# Altium PCB Tigershark 3D R1.4.PcbDoc (part 4 of 4)
Units mil, origin at the board's own origin, x right, y up, seen from the top; angles counter-clockwise.
Board outline 5500 x 4400 mil, 4 copper layers (Top Layer, Groun Plane, Power Plane, Bottom Layer); 267 components, 257 nets, 998 pads, 809 vias.
Unrouted connection lines stored in the file: 3.
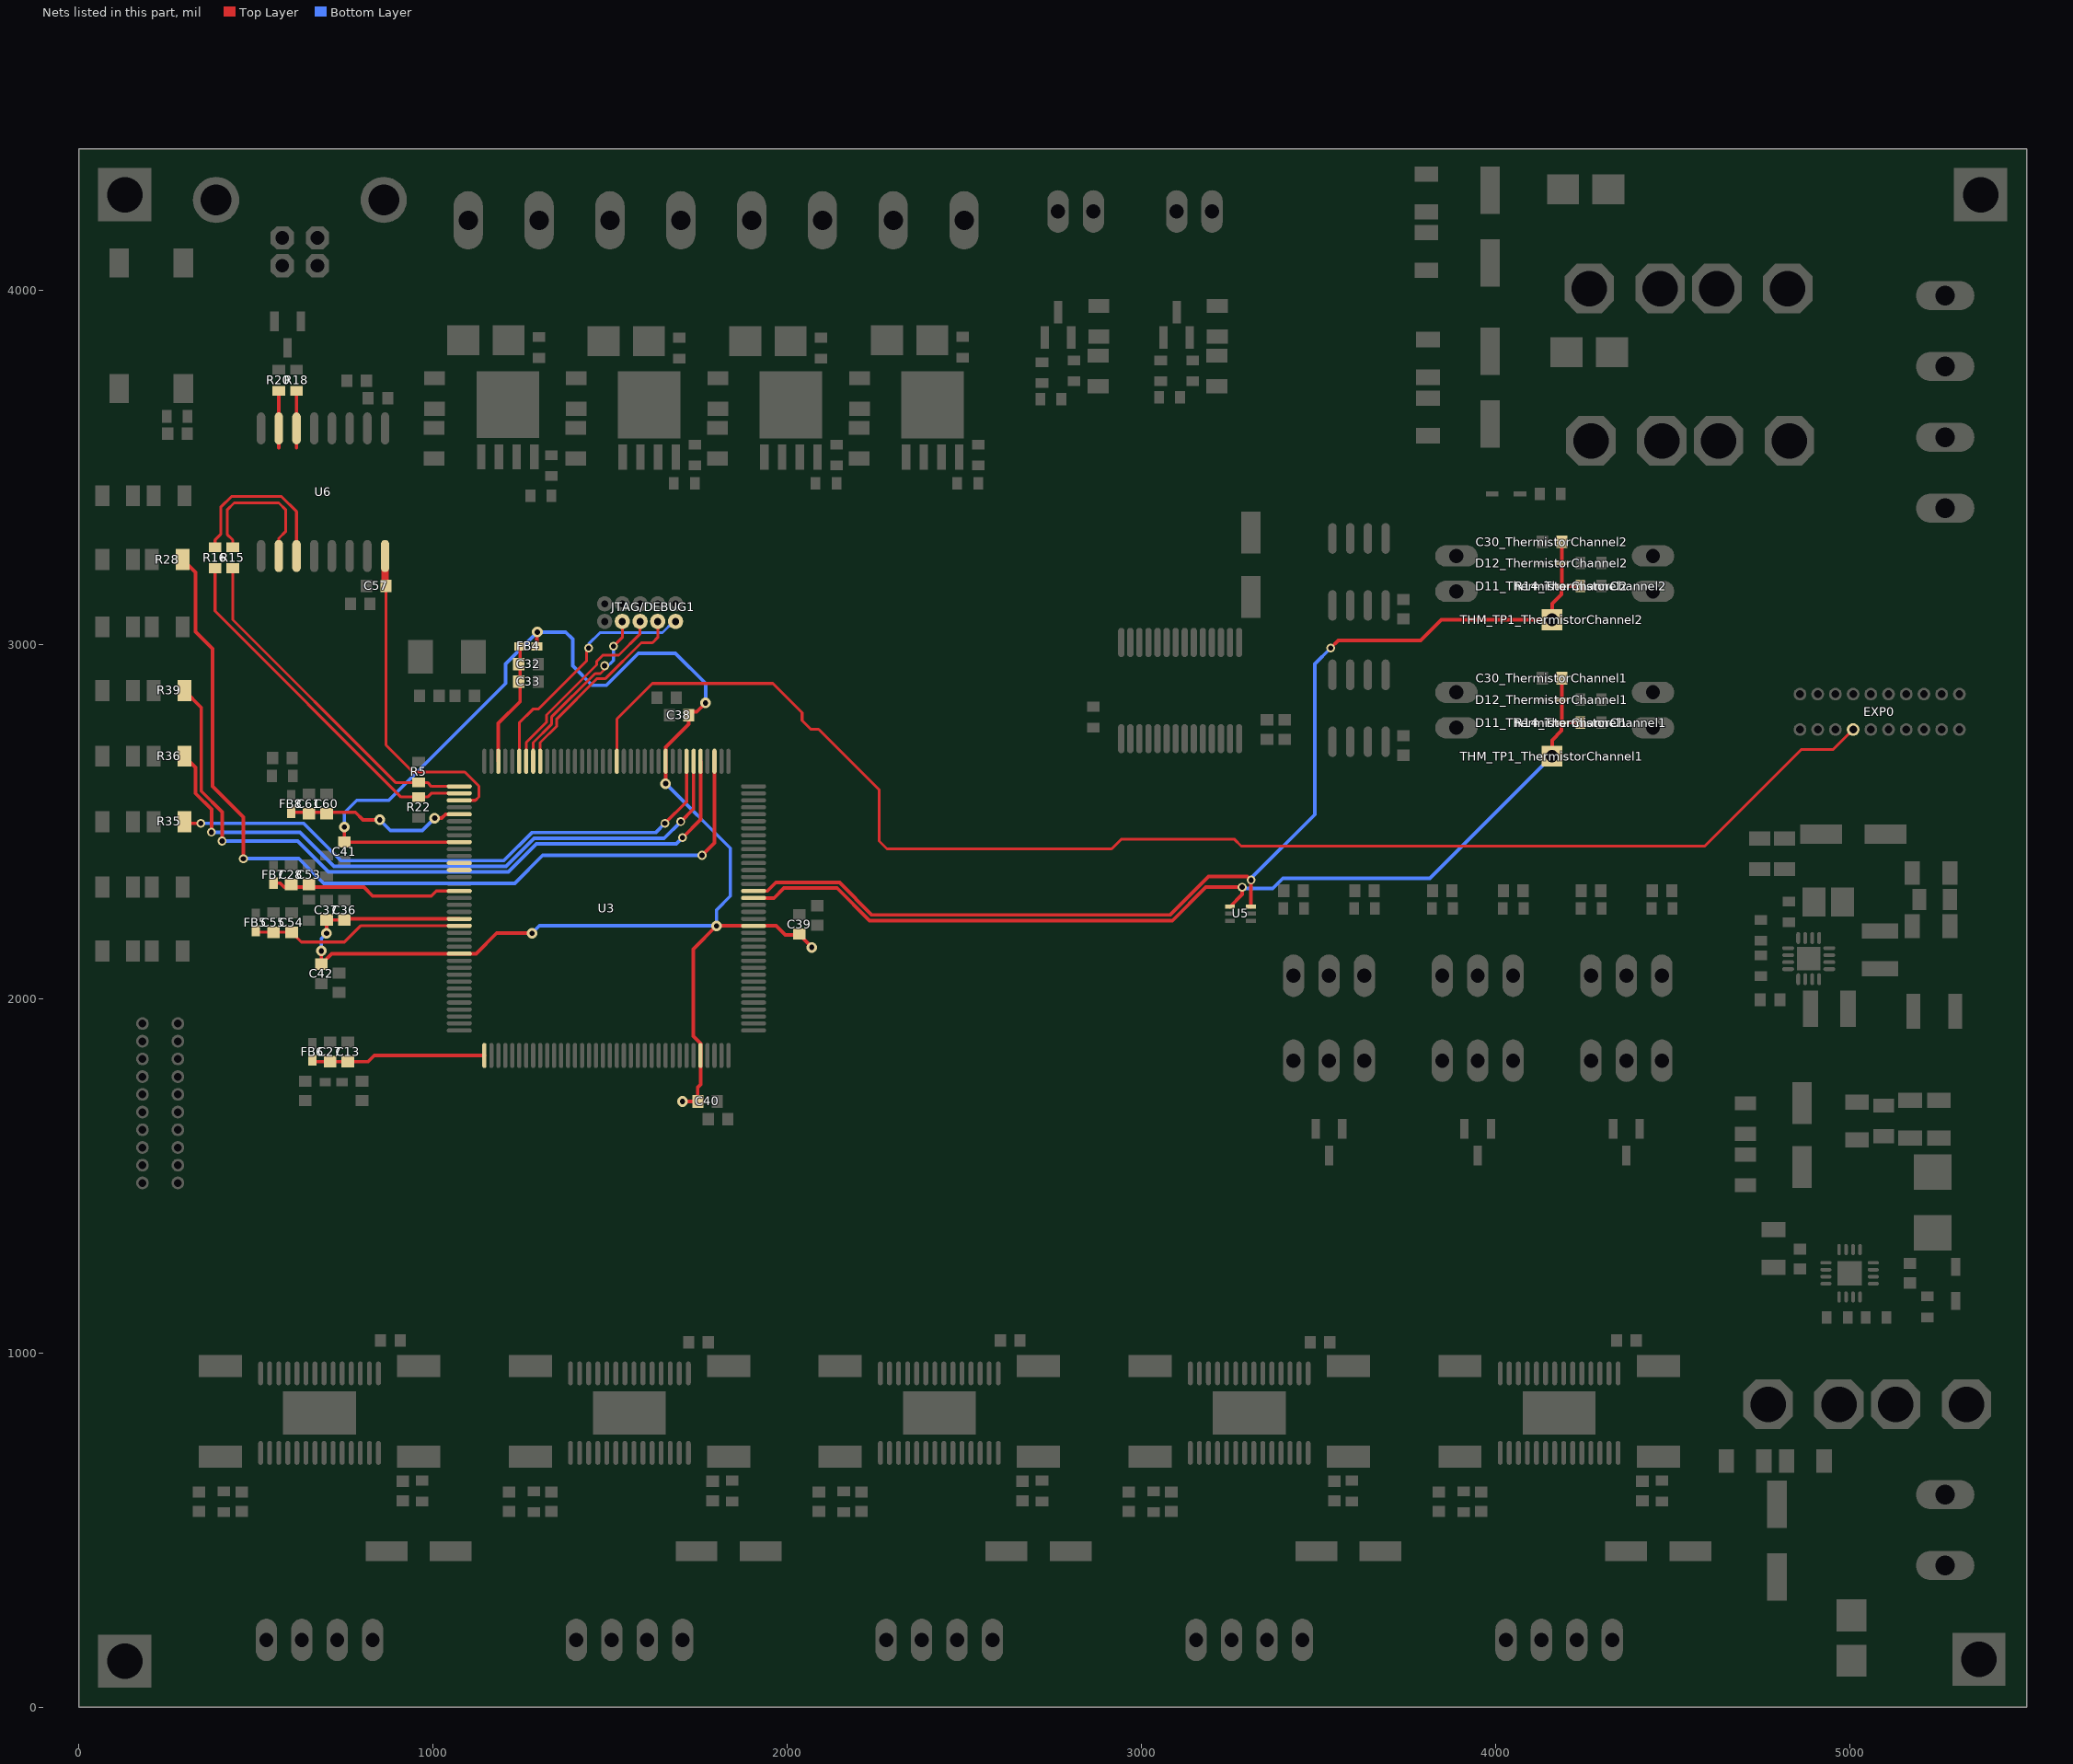
[diagram p6: the nets of this part, all layers, seen from the top]

## Via types
v1: diameter 25, hole 15, Top Layer to Bottom Layer, tented both sides, 375 vias
v2: diameter 30, hole 15, Top Layer to Bottom Layer, tented both sides, 335 vias
v3: diameter 19.68, hole 7.87, Top Layer to Bottom Layer, tented both sides, 75 vias
v4: diameter 50, hole 28, Top Layer to Bottom Layer, tented both sides, 12 vias
v5: diameter 50, hole 20, Top Layer to Bottom Layer, tented both sides, 9 vias
v6: diameter 30, hole 20, Top Layer to Bottom Layer, tented both sides, 3 vias

## Nets (pads, with @x,y where several pads share a name; then routed paths per layer and width w, separated by ;. In a path a pad name is that pad's centre, name@x,y a point inside that pad or via, vN(x,y) a via of type N, cw(c..) or ccw(c..) an arc to the next point about the centre after c; other vN are vias at no path point) (continued)
TCK/SWDCLK: JTAG/DEBUG1.4 U3.28 | length 564.4
  Top Layer w8: U3.28@1302.99,2670.35 1302.99,2722.99 1350,2770 1350,2790 1464,2904 1487.48,2904 1588.48,3005 1620,3005 1635,3020 JTAG/DEBUG1.4@1635,3065
TDI: JTAG/DEBUG1.8 U3.29 | length 521.7
  Top Layer w8: U3.29@1283.31,2670.35 1283.31,2723.11 1335,2774.8 1335,2794.8 1458.2,2918 1473,2918 1490,2935 v1(1485,2940) ; v1(1510,2995) 1535,3020 JTAG/DEBUG1.8@1535,3065
  Bottom Layer w8: v1(1485,2940) 1490,2935 1510,2955 v1(1510,2995)
TDO/SWO: JTAG/DEBUG1.6 U3.30 | length 554.1
  Top Layer w8: U3.30@1263.62,2670.35 1263.62,2723.62 1321,2781 1321,2801.2 1462.5,2942.7 1462.5,2952.5 1480,2970 1525,2970 1585,3030 JTAG/DEBUG1.6@1585,3065
THERM_AN1: C30_ThermistorChannel1.2 D11_ThermistorChannel1.1 D12_ThermistorChannel1.2 R14_ThermistorChannel1.1 THM_TP1_ThermistorChannel1.1 U3.128 U5.4 | length 2853.1
  Top Layer w10: U3.128@1905.35,2284.53 1963.31,2284.53 1991.24,2312.45 2118.93,2312.45 2119.15,2312.23 2141.37,2312.23 2233.1,2220.5 3088.13,2220.5 3182.63,2315 v1(3285,2315) 3285,2294.21 U5.4@3250.47,2259.69 ; THM_TP1_ThermistorChannel1.1@4160,2685 4160,2730 4186.57,2756.57 D11_ThermistorChannel1.1@4186.57,2780 R14_ThermistorChannel1.1@4240.47,2780 ; D11_ThermistorChannel1.1@4187.56,2780.98 C30_ThermistorChannel1.2@4187.56,2905
  Bottom Layer w10: v1(3285,2315) 3288.5,2311.5 3371.5,2311.5 3400,2340 3815,2340 THM_TP1_ThermistorChannel1.1@4160,2685
THERM_AN2: C30_ThermistorChannel2.2 D11_ThermistorChannel2.1 D12_ThermistorChannel2.2 R14_ThermistorChannel2.1 THM_TP1_ThermistorChannel2.1 U3.129 U5.3 | length 3267.6
  Top Layer w10: U3.129@1905.35,2304.21 1944.21,2304.21 1968.45,2328.45 2125.56,2328.45 2125.78,2328.23 2148,2328.23 2239.73,2236.5 3081.5,2236.5 3190,2345 3300,2345 v1(3310,2335) 3310,2260.16 U5.3@3309.53,2259.69 ; v1(3535,2990) 3556.5,3011.5 3788.78,3011.5 3847.28,3070 THM_TP1_ThermistorChannel2.1@4160,3070 4160,3115 4186.57,3141.57 D11_ThermistorChannel2.1@4186.57,3165 R14_ThermistorChannel2.1@4240.47,3165 ; D11_ThermistorChannel2.1@4187.56,3165.98 C30_ThermistorChannel2.2@4187.56,3290
  Bottom Layer w10: v1(3310,2335) 3310,2340 3490,2520 3490,2945 v1(3535,2990)
TMS/SWDIO: JTAG/DEBUG1.2 U3.31 | length 692.4
  Top Layer w8: U3.31@1243.94,2670.35 1243.94,2778.94 1282.5,2817.5 1297.5,2817.5 1434.5,2954.5 1434.5,2984.5 v1(1440,2990)
  Bottom Layer w8: v1(1440,2990) 1440,3001.46 1471.89,3033.35 1648.11,3033.35 1679.76,3065 JTAG/DEBUG1.2@1685,3065
TX_LED: R28.2 U3.3 | length 2553.2
  Top Layer w10: R28.2@293.31,3240 330,3203.31 330,3035.93 378,2987.93 378,2599.37 465,2512.37 v1(465,2395) ; v1(1760,2405) 1795.12,2440.12 U3.3@1795.12,2670.35
  Bottom Layer w10: v1(465,2395) 466,2396 621.63,2396 691.63,2326 1231,2326 1310,2405 v1(1760,2405)
TXD1: EXP0.4 U3.17 | length 4097.8
  Top Layer w8: U3.17@1519.53,2670.35 1519.53,2789.73 1619.8,2890 1960,2890 2042.5,2807.5 2042.5,2785.68 2067.18,2761 2089,2761 2260,2590 2260,2445 2282,2423 2916.48,2423 2943.4,2449.93 3263.45,2449.93 3282.38,2431 4591.4,2431 4864.4,2704 4954,2704 EXP0.4@5010,2760
UD_N: R18.1 U6.6 | length 161.4
  Top Layer w10: 615,3555 R18.1@615,3716.35
UD_P: R20.1 U6.7 | length 161.4
  Top Layer w10: 565,3555 R20.1@565,3716.35
UI_N: R16.2 U6.11 | length 489.4
  Top Layer w8: R16.2@385,3274.53 385,3295 401,3311 401,3387.46 431.54,3418 572.46,3418 615,3375.46 U6.11@615,3249.88
UI_P: R15.2 U6.10 | length 433.1
  Top Layer w8: R15.2@435,3274.53 435,3295 419,3311 419,3380 439,3400 565,3400 585,3380 585,3320 565,3300 U6.10@565,3249.88
UMCU_N: R16.1 R22.1 U3.38 | length 1032.3
  Top Layer w8: R16.1@385,3215.47 385,3094.54 910.02,2569.53 R22.1@960,2569.53 985,2569.53 995.28,2579.8 U3.38@1074.65,2579.8
UMCU_P: R5.1 R15.1 U3.37 | length 980
  Top Layer w8: R15.1@435,3215.47 435,3070 894.53,2610.47 R5.1@960,2610.47 985,2610.47 995.98,2599.49 U3.37@1074.65,2599.49
VBUS: C57.2 U3.39 U6.16 | length 1011.1
  Top Layer w8: U6.16@867.56,3245 867.56,2716.33 943.89,2640 1060,2640 1090,2640 1130,2600 1130,2570 1120.12,2560.12 U3.39@1074.65,2560.12
  Top Layer w20: C57.2@865,3167.56 U6.16@865,3249.88
VDDANA: C13.2 C27.2 FB6.2 U3.73 | length 494.3
  Top Layer w10: FB6.2@663.94,1822.44 C27.2@710,1822.44 C13.2@760,1822.44 817.44,1822.44 834.65,1839.65 U3.73@1145.51,1839.65
  Top Layer w15: FB6.2@660,1826.38 FB6.2@663.94,1822.44
VDDBU: C28.2 C53.2 FB7.2 U3.52 | length 545.6
  Top Layer w10: FB7.2@550,2326.38 568.62,2326.38 580,2315 805,2315 830,2290 995.72,2290 1009.93,2304.21 U3.52@1074.65,2304.21
VDDIN: C54.2 C55.2 FB5.2 U3.57 | length 617.1
  Top Layer w8: FB5.2@501.22,2201.38 FB5.2@505.16,2197.44 ; FB5.2@503.94,2187.44 C55.2@550,2187.44 C54.2@601.22,2187.44 628.66,2160 750,2160 795.79,2205.79 U3.57@1074.65,2205.79 ; C54.2@601.22,2197.44 C54.2@608.66,2190
VDDOUT: C36.2 C37.2 C38.2 C39.2 C40.2 C41.2 C42.2 FB4.1 U3.10 U3.45 U3.56 U3.61 U3.104 U3.124 | length 5261
  Top Layer w10: v2(685,2135) C42.2@685,2097.56 714.49,2127.05 U3.61@1074.65,2127.05 1122.05,2127.05 1180,2185 v2(1280,2185) ; v2(700,2185) C37.2@700,2222.44 C36.2@750,2222.44 753.03,2225.47 U3.56@1074.65,2225.47 ; v2(750,2485) C41.2@750,2442.56 750.55,2442.01 U3.45@1074.65,2442.01 ; FB4.1@1293.62,2995 1293.62,3033.62 v2(1295,3035) ; v2(1657.32,2607.32) U3.10@1657.32,2670.35 1657.32,2709.7 1722.56,2774.93 C38.2@1722.56,2800 1732.56,2810 1745,2810 v2(1770,2835) ; v2(1705,1710) C40.2@1747.87,1710 1747.87,1749.8 1755.75,1757.68 U3.104@1755.75,1839.65 1755.75,1873.4 1735,1894.14 1735,2140 v2(1800.79,2205.79) U3.124@1905.35,2205.79 1969.21,2205.79 ; 1970.16,2204.84 1995,2180 C39.2@2035,2180 ; C39.2@2035,2182.44 C39.2@2035,2180 ; v2(2070,2145) C39.2@2035,2180
  Bottom Layer w10: v2(685,2135) 685,2170 v2(700,2185) ; v2(750,2485) 750,2525 785,2560 875,2560 1205,2890 1205,2945 v2(1295,3035) 1375,3035 1395,3015 1395,2940 1450,2885 1490,2885 1580,2975 1685,2975 1770,2890 v2(1770,2835) ; v2(1280,2185) 1300.79,2205.79 v2(1800.79,2205.79) 1800.79,2250.79 1840,2290 1840,2425 v2@1657.5,2607.5
VDDPLL: C32.2 C33.2 FB4.2 U3.34 | length 350.1
  Top Layer w10: U3.34@1184.88,2670.35 1184.88,2777.51 1246.38,2839.01 FB4.2@1246.38,2995
VDDUTMI: C60.2 C61.2 FB8.2 U3.41 | length 524.9
  Top Layer w10: FB8.2@600,2526.38 781.25,2526.38 802.63,2505 v2(850,2505) ; v2(1005,2510) 1025,2510 1035.75,2520.75 U3.41@1074.65,2520.75
  Bottom Layer w10: v2@850,2515 v2(850,2505) 880,2475 970,2475 v2(1005,2510)
X_LED: R39.2 U3.5 | length 2081.8
  Top Layer w10: R39.2@298.31,2870 346,2822.31 346,2586.12 405,2527.12 v1(405,2445) ; v1(1705,2455) 1755.75,2505.75 U3.5@1755.75,2670.35
  Bottom Layer w10: v1(405,2445) 617.88,2445 704.88,2358 1213.25,2358 1292.25,2437 1687,2437 v1(1705,2455)
XIN32: U3.48
XOUT32: U3.49
Y_LED: R36.2 U3.6 | length 1849
  Top Layer w10: R36.2@298.31,2685 330,2653.31 330,2579.49 375,2534.49 v1(375,2470) ; v1(1700,2500) 1736.06,2536.06 U3.6@1736.06,2670.35
  Bottom Layer w10: v1(375,2470) 625,2470 721,2374 1206.63,2374 1285.63,2453 1653,2453 v1(1700,2500)
Z_LED: R35.2 U3.7 | length 1646.5
  Top Layer w10: R35.2@298.31,2500 303.31,2495 v1(345,2495) ; v1(1655,2495) 1716.38,2556.38 U3.7@1716.38,2670.35
  Bottom Layer w10: v1(345,2495) 635,2495 740,2390 1200,2390 1279,2469 1629,2469 v1(1655,2495)
pads on no net: JTAG/DEBUG1.1@1760.59,3146.5 JTAG/DEBUG1.7 U1.6 U1.7 U3.55 U3.130 U3.138 U4_ThermocoupleChannel1.8 U4_ThermocoupleChannel2.8 U7_DriverChannelDRV88251.18 U7_DriverChannelDRV88251.19 U7_DriverChannelDRV88251.23 U7_DriverChannelDRV88251.27 U7_DriverChannelDRV88252.18 U7_DriverChannelDRV88252.19 U7_DriverChannelDRV88252.23 U7_DriverChannelDRV88252.27 U7_DriverChannelDRV88253.18 U7_DriverChannelDRV88253.19 U7_DriverChannelDRV88253.23 U7_DriverChannelDRV88253.27 U7_DriverChannelDRV88254.18 U7_DriverChannelDRV88254.19 U7_DriverChannelDRV88254.23 U7_DriverChannelDRV88254.27 U7_DriverChannelDRV88255.18 U7_DriverChannelDRV88255.19 U7_DriverChannelDRV88255.23 U7_DriverChannelDRV88255.27 U10.2 U10.3 USB.P$1 USB.P$2
copper on no net: | length 247.5
  Bottom Layer w8: 1740,905 1775,870 ; 2615,905 2650,870 ; 3490,905 3525,870 ; 4365,905 4400,870 4365,905

## Polygon pours and split planes (outlines as drawn)
+12VCC1 on Top Layer "Mechanical 15-No Net" (solid, pour order 73): 4955,1240 4955,1210 4895,1210 4895,1100 4665,1100 4665,1265 4830,1265 4830,1255 4895,1255 4895,1240
+12VCC1 on Top Layer "Top Layer-No Net" (solid, remove dead copper, pour order 71): 5045,955 4650,955 4650,750 4680,750 4680,360 4835,360 4835,285 4625,285 4625,25 4940,25 4940,205 5070,205 5070,310 5045,310 5045,655 4900,655 4900,735 5045,735
GND on Top Layer "Top Layer-No Net" (solid, remove dead copper, pour order 66): 4950,200 4950,25 4955,20 5275,20 5275,225 5475,225 5475,505 5125,505 5125,315 5075,315 5075,200
NetF3_1 on Top Layer "Top Layer-No Net" (solid, remove dead copper, pour order 68): 5125,500 5475,500 5475,955 5055,955 5055,755 5125,755
NetC22_1 on Top Layer "Top Layer-No Net" (solid, remove dead copper, pour order 86): 4869,2070 4924,2070 4924,2090 4959,2090 4959,2035 4909,2035 4909,1905 5154,1905 5154,2020 5204,2020 5204,1840 4869,1840
GND on Top Layer "Top Layer-No Net" (solid, remove dead copper, pour order 114): 3745,3615 3745,3470 4010,3470 4010,3690 3960,3690 3960,3615
NetD11_1 on Top Layer "Top Layer-No Net" (solid, remove dead copper, pour order 110): 2745,3935 2785,3935 2785,3975 2815,4005 2815,4300 2715,4300 2715,4005 2745,3975
NetD10_1 on Top Layer "Top Layer-No Net" (solid, remove dead copper, pour order 109): 3080,3935 3120,3935 3120,3970 3150,4000 3150,4300 3050,4300 3050,4000 3080,3970
GND on Top Layer "Top Layer-No Net" (solid, remove dead copper, pour order 103): 1115,3570 1115,3485 970,3485 970,3295 1305,3295 1305,3485 1255,3485 1255,3570
GND on Top Layer "Top Layer-No Net" (solid, remove dead copper, pour order 92): 4255,4370 4255,4110 5210,4110 5210,4370
NetF1_1 on Top Layer "Top Layer-No Net" (solid, remove dead copper, pour order 95): 4550,3675 4550,3475 5435,3475 5435,3675
NetF2_1 on Top Layer "Top Layer-No Net" (solid, remove dead copper, pour order 97): 4545,4100 4545,3905 5435,3905 5435,4100
GND on Top Layer "Top Layer-No Net" (solid, remove dead copper, pour order 93): 4265,3905 4265,3675 5460,3675 5460,3905
NetD18_1 on Top Layer "Top Layer-No Net" (solid, remove dead copper, pour order 67): 2550,4378.64 2550,3843.64 2470,3843.64 2470,3778.64 2505,3778.64 2505,3578.64 2305,3578.64 2305,3493.64 2170,3493.64 2170,3578.64 2240,3578.64 2240,3718.64 2320,3718.64 2320,3798.64 2365,3798.64 2365,4378.64
NetD16_1 on Top Layer "Top Layer-No Net" (solid, remove dead copper, pour order 69): 2150,4378.64 2150,3843.64 2070,3843.64 2070,3778.64 2105,3778.64 2105,3578.64 1905,3578.64 1905,3493.64 1770,3493.64 1770,3578.64 1840,3578.64 1840,3718.64 1920,3718.64 1920,3798.64 1965,3798.64 1965,4378.64
NetD14_1 on Top Layer "Top Layer-No Net" (solid, remove dead copper, pour order 70): 1750,4378.64 1750,3843.64 1670,3843.64 1670,3778.64 1705,3778.64 1705,3578.64 1505,3578.64 1505,3493.64 1370,3493.64 1370,3578.64 1440,3578.64 1440,3718.64 1520,3718.64 1520,3798.64 1565,3798.64 1565,4378.64
NetD12_1 on Top Layer "Top Layer-No Net" (solid, remove dead copper, pour order 72): 1350,4378.64 1350,3843.64 1270,3843.64 1270,3778.64 1305,3778.64 1305,3578.64 1105,3578.64 1105,3493.64 970,3493.64 970,3578.64 1040,3578.64 1040,3718.64 1120,3718.64 1120,3798.64 1165,3798.64 1165,4378.64
NetC4_1 on Top Layer "Top Layer-No Net" (solid, remove dead copper, pour order 91): 4943.55,2319.18 4943.55,2227.18 4973.55,2227.18 4973.55,2166.18 5145.55,2166.18 5255,2165 5255,2245 5310,2245 5310,2315 5225,2315 5225,2240 5145,2240 5145.55,2319.18
+12VCC2 on Top Layer "Top Layer-No Net" (solid, remove dead copper, pour order 78): 2360,4378.64 2175,4378.64 2175,3733.64 2315,3733.64 2315,3808.64 2360,3808.64 2360,4378.64
+12VCC2 on Top Layer "Top Layer-No Net" (solid, remove dead copper, pour order 77): 1960,4378.64 1775,4378.64 1775,3733.64 1915,3733.64 1915,3808.64 1960,3808.64 1960,4378.64
+12VCC2 on Top Layer "Top Layer-No Net" (solid, remove dead copper, pour order 76): 1560,4378.64 1375,4378.64 1375,3733.64 1515,3733.64 1515,3808.64 1560,3808.64 1560,4378.64
+12VCC3 on Top Layer "Top Layer-No Net" (solid, remove dead copper, pour order 58): 1160,4378.64 975,4378.64 975,3733.64 1115,3733.64 1115,3808.64 1160,3808.64 1160,4378.64
3.3VCC on Top Layer "Top Layer-No Net" (solid, remove dead copper, pour order 64): 5225,2250 5225,2400 5310,2400 5310,2500 5035,2500 5035,2385 4785,2385 4785,2330 5150,2330 5150,2250
SW on Top Layer "Mechanical 15-No Net" (solid, pour order 79): 4900,1250 4965,1250 4965,1265 4975,1265 4975,1365 4900,1365
GND on Top Layer "Mechanical 15-No Net" (solid, pour order 80): 4985,1265 5015,1265 5015,1405 4740,1405 4740,1310 4830,1310 4830,1275 4895,1275 4895,1370 4985,1370
+12VCC1 on Top Layer "Mechanical 15-No Net" (solid, remove dead copper, pour order 74): 5045,1245 5045,1225 5080,1225 5080,1215 5145,1215 5145,1255 5080,1255 5080,1245
SW on Top Layer "Mechanical 15-No Net" (solid, pour order 75): 5025,1250 5025,1310 5035,1310 5035,1365 5180,1365 5180,1395 5290,1395 5290,1275 5320,1275 5320,1210 5280,1210 5280,1240 5150,1240 5150,1260 5090,1260 5090,1250
NetL2_1 on Top Layer "Top Layer-No Net" (solid, remove dead copper, pour order 87): 4866.55,2155.18 4922.55,2155.18 4922.55,2313.18 4866.55,2313.18
NetC24_2 on Top Layer "Top Layer-No Net" (solid, remove dead copper, pour order 89): 4849.55,2068.18 4859.55,2068.18 4859.55,2043.18 4859.55,1978.18 4784.55,1978.18 4784.55,2018.18 4849.55,2018.18
GND on Top Layer "Top Layer-No Net" (solid, remove dead copper, pour order 88): 4914.55,2117.18 4914.55,2147.18 5145.55,2147.18 5145.55,1913.18 4969.55,1913.18 4969.55,2029.18 5010.55,2029.18 5010.55,2117.18
GND on Top Layer "Top Layer-No Net" (solid, remove dead copper, pour order 90): 4731.55,1915.18 4858.55,1915.18 4858.55,1970.18 4772.55,1970.18 4772.55,2077.18 4852.55,2077.18 4852.55,2131.18 4803.55,2131.18 4803.55,2102.18 4731.55,2102.18
GND on Top Layer "Top Layer-No Net" (solid, remove dead copper, pour order 102): 1514.5,3569.61 1514.5,3484.61 1369.5,3484.61 1369.5,3299.61 1699.5,3299.61 1704.5,3304.61 1704.5,3484.61 1654.5,3484.61 1654.5,3569.61
GND on Top Layer "Top Layer-No Net" (solid, remove dead copper, pour order 101): 1914.5,3569.61 1914.5,3484.61 1769.5,3484.61 1769.5,3299.61 2099.5,3299.61 2104.5,3304.61 2104.5,3484.61 2054.5,3484.61 2054.5,3569.61
GND on Top Layer "Top Layer-No Net" (solid, remove dead copper, pour order 100): 2314.5,3569.61 2314.5,3484.61 2169.5,3484.61 2169.5,3299.61 2499.5,3299.61 2504.5,3304.61 2504.5,3484.61 2454.5,3484.61 2454.5,3569.61
+12VCC2 on Top Layer "Top Layer-No Net" (solid, remove dead copper, pour order 112): 3245,3935 3245,4300 3160,4300 3160,3985 3185,3985 3185,3935
+12VCC2 on Top Layer "Top Layer-No Net" (solid, remove dead copper, pour order 111): 2910,3935 2910,4300 2825,4300 2825,3985 2850,3985 2850,3935
SW_OUT on Top Layer "Top Layer-No Net" (solid, remove dead copper, pour order 60): 5291,1635 5291,1455 5130,1455 5130,1580 5066,1580 5066,1635
+12VCC3 on Top Layer "Top Layer-No Net" (solid, remove dead copper, pour order 99): 4545,3475 4545,3675 4255,3675 4255,3900 3855,3900 3855,3830 3760,3830 3760,3995 3480,3995 3480,3620 3950,3620 3950,3700 4020,3700 4020,3475
GND on Top Layer "Top Layer-No Net" (solid, remove dead copper, pour order 113): 3770,4085 3770,3835 3850,3835 3850,3910 4010,3910 4010,4145 3960,4145 3960,4085
GND on Top Layer "Top Layer-No Net" (solid, remove dead copper, pour order 85): 260,1325 555,1325 555,1050 470,1050 470,975 520,975 520,900 875,900 875,975 895,975 895,1080 735,1080 735,1325 1115,1325 1115,55 875,55 875,405 995,405 995,480 890,480 890,600 940,600 940,555 995,555 995,660 1030,660 1030,760 885,760 885,685 840,685 840,760 315,760 315,525 490,525 490,55 260,55
GND on Top Layer "Top Layer-No Net" (solid, remove dead copper, pour order 84): 1135,1325 1430,1325 1430,1050 1345,1050 1345,975 1395,975 1395,900 1750,900 1750,975 1770,975 1770,1080 1610,1080 1610,1325 1990,1325 1990,55 1750,55 1750,405 1870,405 1870,480 1765,480 1765,600 1815,600 1815,555 1870,555 1870,660 1905,660 1905,760 1760,760 1760,685 1715,685 1715,760 1190,760 1190,525 1365,525 1365,55 1135,55
GND on Top Layer "Top Layer-No Net" (solid, remove dead copper, pour order 83): 2010,1325 2305,1325 2305,1050 2220,1050 2220,975 2270,975 2270,900 2625,900 2625,975 2645,975 2645,1080 2485,1080 2485,1325 2865,1325 2865,55 2625,55 2625,405 2745,405 2745,480 2640,480 2640,600 2690,600 2690,555 2745,555 2745,660 2780,660 2780,760 2635,760 2635,685 2590,685 2590,760 2065,760 2065,525 2240,525 2240,55 2010,55
GND on Top Layer "Top Layer-No Net" (solid, remove dead copper, pour order 82): 2885,1325 3180,1325 3180,1050 3095,1050 3095,975 3145,975 3145,900 3500,900 3500,975 3520,975 3520,1080 3360,1080 3360,1325 3740,1325 3740,55 3500,55 3500,405 3620,405 3620,480 3515,480 3515,600 3565,600 3565,555 3620,555 3620,660 3655,660 3655,760 3510,760 3510,685 3465,685 3465,760 2940,760 2940,525 3115,525 3115,55 2885,55
GND on Top Layer "Top Layer-No Net" (solid, remove dead copper, pour order 81): 3760,1325 4055,1325 4055,1050 3970,1050 3970,975 4020,975 4020,900 4375,900 4375,975 4395,975 4395,1080 4235,1080 4235,1325 4615,1325 4615,55 4375,55 4375,405 4495,405 4495,480 4390,480 4390,600 4440,600 4440,555 4495,555 4495,660 4530,660 4530,760 4385,760 4385,685 4340,685 4340,760 3815,760 3815,525 3990,525 3990,55 3760,55
+12VCC2 on Top Layer "Top Layer-No Net" (solid, remove dead copper, pour order 59): 3280,4375 3280,3255 3350,3255 3350,2955 2955,2955 2955,3045 2875,3045 2875,2850 3450,2850 3450,4375
GND on Top Layer "Top Layer-No Net" (solid, remove dead copper, pour order 63): 3265,2965 3345,2965 3345,3245 3270,3245 3270,3450 3190,3450 3190,3240 3265,3165
+12VCC2 on Top Layer "Top Layer-No Net" (solid, remove dead copper, pour order 98): 4545,3905 4545,4100 4255,4100 4245,4110 4245,4360 3860,4360 3860,4300 3720,4300 3720,4370 3480,4370 3480,4020 3760,4020 3760,4090 3950,4090 3950,4155 4020,4155 4020,3905
+5VCC on Top Layer "Top Layer-No Net" (solid, remove dead copper, pour order 61): 4676,1650 4676,1830 5275,1830 5275,2020 5325,2020 5325,1780 4850,1780 4850,1770 5126,1770 5126,1650
GND on Bottom Layer "Top Layer-No Net" (solid, remove dead copper, pour order 108): 250,1325 250,25 1115,25 1115,1325
NetF1_1 on Bottom Layer "Top Layer-No Net" (solid, remove dead copper, pour order 94): 4550,3675 4550,3475 5435,3475 5435,3675
NetF2_1 on Bottom Layer "Top Layer-No Net" (solid, remove dead copper, pour order 96): 4545,4100 4545,3905 5435,3905 5435,4100
SW on Bottom Layer "Mechanical 15-No Net" (solid, pour order 65): 5100,1285 4900,1285 4900,1365 5100,1365
+12VCC1 on Bottom Layer "Mechanical 15-No Net" (solid, pour order 62): 4830,1223.21 4890,1223.21 4890,1175 5080,1175 5080,1250 5145,1250 5145,1100 4830,1100
GND on Bottom Layer "Top Layer-No Net" (solid, remove dead copper, pour order 107): 1125,1325 1125,25 1990,25 1990,1325
GND on Bottom Layer "Top Layer-No Net" (solid, remove dead copper, pour order 106): 2000,1325 2000,25 2865,25 2865,1325
GND on Bottom Layer "Top Layer-No Net" (solid, remove dead copper, pour order 105): 2875,1325 2875,25 3740,25 3740,1325
GND on Bottom Layer "Top Layer-No Net" (solid, remove dead copper, pour order 104): 3750,1325 3750,25 4615,25 4615,1325
INPUT_GND on Groun Plane (split plane): 934.9,4222.11 881.4,4168.6 880.29,4166.95 879.9,4165 879.9,3901.25 879.9,3821.25 880.29,3819.3 881.4,3817.65 914.9,3784.14 914.9,3562.11 827.89,3475.1 547.11,3475.1 465.1,3557.11 465.1,3852.5 465.1,3932.5 465.1,4065 464.71,4066.95 463.6,4068.6 305.1,4227.11 305.1,4379.9 934.9,4379.9
GND on Groun Plane (split plane): 5479.9,20.1 20.1,20.1 20.1,4379.9 294.9,4379.9 294.9,4225 295.29,4223.05 296.4,4221.4 454.9,4062.89 454.9,3932.5 454.9,3852.5 454.9,3555 455.29,3553.05 456.4,3551.4 541.4,3466.4 543.05,3465.29 545,3464.9 830,3464.9 831.95,3465.29 833.6,3466.4 923.6,3556.4 924.71,3558.05 925.1,3560 925.1,3786.25 924.71,3788.2 923.6,3789.85 890.1,3823.36 890.1,3901.25 890.1,4162.89 943.6,4216.4 944.71,4218.05 945.1,4220 945.1,4379.9 5479.9,4379.9
+12VCC3 on Power Plane (split plane): 4537.77,4005 4537.42,3997.87 4536.37,3990.8 4534.64,3983.88 4532.23,3977.15 4529.18,3970.7 4525.51,3964.57 4521.25,3958.84 4516.46,3953.54 4511.16,3948.75 4505.43,3944.49 4499.3,3940.82 4492.85,3937.77 4486.12,3935.36 4479.2,3933.63 4472.13,3932.58 4465,3932.23 4457.87,3932.58 4450.8,3933.63 4443.88,3935.36 4437.15,3937.77 4430.7,3940.82 4424.57,3944.49 4418.84,3948.75 4413.54,3953.54 4408.75,3958.84 4404.49,3964.57 4400.82,3970.7 4397.77,3977.15 4395.36,3983.88 4393.63,3990.8 4392.58,3997.87 4392.23,4005 4392.47,4009.9 4537.53,4009.9
no net on Power Plane (split plane): 4539.64,3596.12 4541.37,3589.2 4542.42,3582.13 4542.77,3575 4542.42,3567.87 4541.37,3560.8 4539.64,3553.88 4537.23,3547.15 4534.18,3540.7 4530.51,3534.57 4526.25,3528.84 4521.46,3523.54 4516.16,3518.75 4510.43,3514.49 4504.3,3510.82 4497.85,3507.77 4491.12,3505.36 4484.2,3503.63 4477.13,3502.58 4470,3502.23 4462.87,3502.58 4455.8,3503.63 4448.88,3505.36 4442.15,3507.77 4435.7,3510.82 4429.57,3514.49 4423.84,3518.75 4418.54,3523.54 4413.75,3528.84 4409.49,3534.57 4405.82,3540.7 4402.77,3547.15 4400.36,3553.88 4398.63,3560.8 4397.58,3567.87 4397.23,3575 4397.58,3582.13 4398.63,3589.2 4400.36,3596.12 4401.72,3599.9 4538.28,3599.9
+12VCC2 on Power Plane (split plane): 4472.13,4077.42 4479.2,4076.37 4486.12,4074.64 4492.85,4072.23 4499.3,4069.18 4505.43,4065.51 4511.16,4061.25 4516.46,4056.46 4521.25,4051.16 4525.51,4045.43 4529.18,4039.3 4532.23,4032.85 4534.64,4026.12 4536.15,4020.1 4393.85,4020.1 4395.36,4026.12 4397.77,4032.85 4400.82,4039.3 4404.49,4045.43 4408.75,4051.16 4413.54,4056.46 4418.84,4061.25 4424.57,4065.51 4430.7,4069.18 4437.15,4072.23 4443.88,4074.64 4450.8,4076.37 4457.87,4077.42 4465,4077.77
no net on Power Plane (split plane): 4477.13,3647.42 4484.2,3646.37 4491.12,3644.64 4497.85,3642.23 4504.3,3639.18 4510.43,3635.51 4516.16,3631.25 4521.46,3626.46 4526.25,3621.16 4530.51,3615.43 4533.7,3610.1 4406.3,3610.1 4409.49,3615.43 4413.75,3621.16 4418.54,3626.46 4423.84,3631.25 4429.57,3635.51 4435.7,3639.18 4442.15,3642.23 4448.88,3644.64 4455.8,3646.37 4462.87,3647.42 4470,3647.77
+5VCC on Power Plane (split plane): 5354.9,1835 5355.29,1833.05 5356.4,1831.4 5358.05,1830.29 5360,1829.9 5479.9,1829.9 5479.9,1025.1 4790.1,1025.1 4790.1,1265 4789.71,1266.95 4788.6,1268.6 4786.95,1269.71 4785,1270.1 4625.1,1270.1 4625.1,1849.9 5354.9,1849.9
3.3VCC on Power Plane (split plane): 4976.86,924.65 4983.65,923.64 4990.32,921.97 4996.78,919.66 5002.99,916.72 5008.88,913.19 5014.4,909.1 5019.49,904.49 5024.1,899.4 5028.19,893.88 5031.72,887.99 5034.66,881.78 5036.97,875.32 5038.64,868.65 5039.65,861.86 5039.98,855 5039.65,848.14 5038.64,841.35 5036.97,834.68 5034.66,828.22 5031.72,822.01 5028.19,816.12 5024.1,810.6 5019.49,805.51 5014.4,800.9 5008.88,796.81 5002.99,793.28 4996.78,790.34 4990.32,788.03 4983.65,786.36 4976.86,785.35 4970,785.02 4963.14,785.35 4956.35,786.36 4949.68,788.03 4943.22,790.34 4937.01,793.28 4931.12,796.81 4925.6,800.9 4920.51,805.51 4915.9,810.6 4911.81,816.12 4908.28,822.01 4905.34,828.22 4903.03,834.68 4901.36,841.35 4900.35,848.14 4900.02,855 4900.35,861.86 4901.36,868.65 4903.03,875.32 4905.34,881.78 4908.28,887.99 4911.81,893.88 4915.9,899.4 4920.51,904.49 4925.6,909.1 4931.12,913.19 4937.01,916.72 4943.22,919.66 4949.68,921.97 4956.35,923.64 4963.14,924.65 4970,924.98
3.3VCC on Power Plane (split plane): 4874.9,1115.1 4840.1,1115.1 4840.1,1199.9 4874.9,1199.9
3.3VCC on Power Plane (split plane): 4776.79,923.98 4783.52,922.98 4790.12,921.33 4796.53,919.04 4802.67,916.13 4808.51,912.63 4813.97,908.58 4819.01,904.01 4823.58,898.97 4827.63,893.51 4831.13,887.67 4834.04,881.53 4836.33,875.12 4837.98,868.52 4838.98,861.79 4839.31,855 4838.98,848.21 4837.98,841.48 4836.33,834.88 4834.04,828.47 4831.13,822.33 4827.63,816.49 4823.58,811.03 4819.01,805.99 4813.97,801.42 4808.51,797.37 4802.67,793.87 4796.53,790.96 4790.12,788.67 4783.52,787.02 4776.79,786.02 4770,785.69 4763.21,786.02 4756.48,787.02 4749.88,788.67 4743.47,790.96 4737.33,793.87 4731.49,797.37 4726.03,801.42 4720.99,805.99 4716.42,811.03 4712.37,816.49 4708.87,822.33 4705.96,828.47 4703.67,834.88 4702.02,841.48 4701.02,848.21 4700.69,855 4701.02,861.79 4702.02,868.52 4703.67,875.12 4705.96,881.53 4708.87,887.67 4712.37,893.51 4716.42,898.97 4720.99,904.01 4726.03,908.58 4731.49,912.63 4737.33,916.13 4743.47,919.04 4749.88,921.33 4756.48,922.98 4763.21,923.98 4770,924.31
+12VCC2 on Power Plane (split plane): 5479.9,4020.1 4546.45,4020.1 4546.29,4021.17 4544.31,4029.06 4541.57,4036.72 4538.1,4044.07 4533.91,4051.05 4529.07,4057.58 4523.61,4063.61 4517.58,4069.07 4511.05,4073.91 4504.07,4078.1 4496.72,4081.57 4489.06,4084.31 4481.17,4086.29 4473.12,4087.48 4465,4087.88 4456.88,4087.48 4448.83,4086.29 4440.94,4084.31 4433.28,4081.57 4425.93,4078.1 4418.95,4073.91 4412.42,4069.07 4406.39,4063.61 4400.93,4057.58 4396.09,4051.05 4391.9,4044.07 4388.43,4036.72 4385.69,4029.06 4383.71,4021.17 4383.55,4020.1 4346.45,4020.1 4346.29,4021.17 4344.31,4029.06 4341.57,4036.72 4338.1,4044.07 4333.91,4051.05 4329.07,4057.58 4323.61,4063.61 4317.58,4069.07 4311.05,4073.91 4304.07,4078.1 4296.72,4081.57 4289.06,4084.31 4281.17,4086.29 4273.12,4087.48 4265,4087.88 4256.88,4087.48 4248.83,4086.29 4240.94,4084.31 4233.28,4081.57 4225.93,4078.1 4218.95,4073.91 4212.42,4069.07 4206.39,4063.61 4200.93,4057.58 4196.09,4051.05 4191.9,4044.07 4188.43,4036.72 4185.69,4029.06 4183.71,4021.17 4183.55,4020.1 1415.1,4020.1 1415.1,4379.9 5479.9,4379.9
+12VCC3 on Power Plane (split plane): 4337.77,4005 4337.42,3997.87 4336.37,3990.8 4334.64,3983.88 4332.23,3977.15 4329.18,3970.7 4325.51,3964.57 4321.25,3958.84 4316.46,3953.54 4311.16,3948.75 4305.43,3944.49 4299.3,3940.82 4292.85,3937.77 4286.12,3935.36 4279.2,3933.63 4272.13,3932.58 4265,3932.23 4257.87,3932.58 4250.8,3933.63 4243.88,3935.36 4237.15,3937.77 4230.7,3940.82 4224.57,3944.49 4218.84,3948.75 4213.54,3953.54 4208.75,3958.84 4204.49,3964.57 4200.82,3970.7 4197.77,3977.15 4195.36,3983.88 4193.63,3990.8 4192.58,3997.87 4192.23,4005 4192.47,4009.9 4337.53,4009.9
+12VCC2 on Power Plane (split plane): 4272.13,4077.42 4279.2,4076.37 4286.12,4074.64 4292.85,4072.23 4299.3,4069.18 4305.43,4065.51 4311.16,4061.25 4316.46,4056.46 4321.25,4051.16 4325.51,4045.43 4329.18,4039.3 4332.23,4032.85 4334.64,4026.12 4336.15,4020.1 4193.85,4020.1 4195.36,4026.12 4197.77,4032.85 4200.82,4039.3 4204.49,4045.43 4208.75,4051.16 4213.54,4056.46 4218.84,4061.25 4224.57,4065.51 4230.7,4069.18 4237.15,4072.23 4243.88,4074.64 4250.8,4076.37 4257.87,4077.42 4265,4077.77
no net on Power Plane (split plane): 4277.13,3647.42 4284.2,3646.37 4291.12,3644.64 4297.85,3642.23 4304.3,3639.18 4310.43,3635.51 4316.16,3631.25 4321.46,3626.46 4326.25,3621.16 4330.51,3615.43 4333.7,3610.1 4206.3,3610.1 4209.49,3615.43 4213.75,3621.16 4218.54,3626.46 4223.84,3631.25 4229.57,3635.51 4235.7,3639.18 4242.15,3642.23 4248.88,3644.64 4255.8,3646.37 4262.87,3647.42 4270,3647.77
3.3VCC on Power Plane (split plane): 964.9,3695 965.29,3693.05 966.4,3691.4 968.05,3690.29 970,3689.9 3469.9,3689.9 3469.9,3605 3470.29,3603.05 3471.4,3601.4 3473.05,3600.29 3475,3599.9 4190.99,3599.9 4190.69,3599.06 4188.71,3591.17 4187.52,3583.12 4187.12,3575 4187.52,3566.88 4188.71,3558.83 4190.69,3550.94 4193.43,3543.28 4196.9,3535.93 4201.09,3528.95 4205.93,3522.42 4211.39,3516.39 4217.42,3510.93 4223.95,3506.09 4230.93,3501.91 4238.28,3498.43 4245.94,3495.69 4253.83,3493.71 4261.88,3492.52 4270,3492.12 4278.12,3492.52 4286.17,3493.71 4294.06,3495.69 4301.72,3498.43 4309.07,3501.91 4316.05,3506.09 4322.58,3510.93 4328.61,3516.39 4334.07,3522.42 4338.91,3528.95 4343.1,3535.93 4346.57,3543.28 4349.31,3550.94 4351.29,3558.83 4352.48,3566.88 4352.88,3575 4352.48,3583.12 4351.29,3591.17 4349.31,3599.06 4349.01,3599.9 4390.99,3599.9 4390.69,3599.06 4388.71,3591.17 4387.52,3583.12 4387.12,3575 4387.52,3566.88 4388.71,3558.83 4390.69,3550.94 4393.43,3543.28 4396.9,3535.93 4401.09,3528.95 4405.93,3522.42 4411.39,3516.39 4417.42,3510.93 4423.95,3506.09 4430.93,3501.91 4438.28,3498.43 4445.94,3495.69 4453.83,3493.71 4461.88,3492.52 4470,3492.12 4478.12,3492.52 4486.17,3493.71 4494.06,3495.69 4501.72,3498.43 4509.07,3501.91 4516.05,3506.09 4522.58,3510.93 4528.61,3516.39 4534.07,3522.42 4538.91,3528.95 4543.1,3535.93 4546.57,3543.28 4549.31,3550.94 4551.29,3558.83 4552.48,3566.88 4552.88,3575 4552.48,3583.12 4551.29,3591.17 4549.31,3599.06 4549.01,3599.9 5479.9,3599.9 5479.9,1840.1 5365.1,1840.1 5365.1,1855 5364.71,1856.95 5363.6,1858.6 5361.95,1859.71 5360,1860.1 4620,1860.1 4618.05,1859.71 4616.4,1858.6 4615.29,1856.95 4614.9,1855 4614.9,1270.1 4445,1270.1 4443.05,1269.71 4441.4,1268.6 4440.29,1266.95 4439.9,1265 4439.9,855.1 20.1,855.1 20.1,4379.9 964.9,4379.9
+12VCC3 on Power Plane (split plane): 1404.9,4015 1405.29,4013.05 1406.4,4011.4 1408.05,4010.29 1410,4009.9 4182.36,4009.9 4182.12,4005 4182.52,3996.88 4183.71,3988.83 4185.69,3980.94 4188.43,3973.28 4191.9,3965.93 4196.09,3958.95 4200.93,3952.42 4206.39,3946.39 4212.42,3940.93 4218.95,3936.09 4225.93,3931.9 4233.28,3928.43 4240.94,3925.69 4248.83,3923.71 4256.88,3922.52 4265,3922.12 4273.12,3922.52 4281.17,3923.71 4289.06,3925.69 4296.72,3928.43 4304.07,3931.9 4311.05,3936.09 4317.58,3940.93 4323.61,3946.39 4329.07,3952.42 4333.91,3958.95 4338.1,3965.93 4341.57,3973.28 4344.31,3980.94 4346.29,3988.83 4347.48,3996.88 4347.88,4005 4347.64,4009.9 4382.36,4009.9 4382.12,4005 4382.52,3996.88 4383.71,3988.83 4385.69,3980.94 4388.43,3973.28 4391.9,3965.93 4396.09,3958.95 4400.93,3952.42 4406.39,3946.39 4412.42,3940.93 4418.95,3936.09 4425.93,3931.9 4433.28,3928.43 4440.94,3925.69 4448.83,3923.71 4456.88,3922.52 4465,3922.12 4473.12,3922.52 4481.17,3923.71 4489.06,3925.69 4496.72,3928.43 4504.07,3931.9 4511.05,3936.09 4517.58,3940.93 4523.61,3946.39 4529.07,3952.42 4533.91,3958.95 4538.1,3965.93 4541.57,3973.28 4544.31,3980.94 4546.29,3988.83 4547.48,3996.88 4547.88,4005 4547.64,4009.9 5479.9,4009.9 5479.9,3610.1 4544.97,3610.1 4543.1,3614.07 4538.91,3621.05 4534.07,3627.58 4528.61,3633.61 4522.58,3639.07 4516.05,3643.91 4509.07,3648.1 4501.72,3651.57 4494.06,3654.31 4486.17,3656.29 4478.12,3657.48 4470,3657.88 4461.88,3657.48 4453.83,3656.29 4445.94,3654.31 4438.28,3651.57 4430.93,3648.1 4423.95,3643.91 4417.42,3639.07 4411.39,3633.61 4405.93,3627.58 4401.09,3621.05 4396.9,3614.07 4395.03,3610.1 4344.97,3610.1 4343.1,3614.07 4338.91,3621.05 4334.07,3627.58 4328.61,3633.61 4322.58,3639.07 4316.05,3643.91 4309.07,3648.1 4301.72,3651.57 4294.06,3654.31 4286.17,3656.29 4278.12,3657.48 4270,3657.88 4261.88,3657.48 4253.83,3656.29 4245.94,3654.31 4238.28,3651.57 4230.93,3648.1 4223.95,3643.91 4217.42,3639.07 4211.39,3633.61 4205.93,3627.58 4201.09,3621.05 4196.9,3614.07 4195.03,3610.1 3480.1,3610.1 3480.1,3695 3479.71,3696.95 3478.6,3698.6 3476.95,3699.71 3475,3700.1 975.1,3700.1 975.1,4379.9 1404.9,4379.9
no net on Power Plane (split plane): 4339.64,3596.12 4341.37,3589.2 4342.42,3582.13 4342.77,3575 4342.42,3567.87 4341.37,3560.8 4339.64,3553.88 4337.23,3547.15 4334.18,3540.7 4330.51,3534.57 4326.25,3528.84 4321.46,3523.54 4316.16,3518.75 4310.43,3514.49 4304.3,3510.82 4297.85,3507.77 4291.12,3505.36 4284.2,3503.63 4277.13,3502.58 4270,3502.23 4262.87,3502.58 4255.8,3503.63 4248.88,3505.36 4242.15,3507.77 4235.7,3510.82 4229.57,3514.49 4223.84,3518.75 4218.54,3523.54 4213.75,3528.84 4209.49,3534.57 4205.82,3540.7 4202.77,3547.15 4200.36,3553.88 4198.63,3560.8 4197.58,3567.87 4197.23,3575 4197.58,3582.13 4198.63,3589.2 4200.36,3596.12 4201.72,3599.9 4338.28,3599.9
+12VCC1 on Power Plane (split plane): 4779.9,1020 4780.29,1018.05 4781.4,1016.4 4783.05,1015.29 4785,1014.9 5479.9,1014.9 5479.9,20.1 20.1,20.1 20.1,844.9 4445,844.9 4446.95,845.29 4448.6,846.4 4449.71,848.05 4450.1,850 4450.1,1259.9 4779.9,1259.9

## Keep-outs
Keep-Out Layer:
  lines w10: 25,25 25,4375 5475,4375 5475,25 25,25

## Other copper
Groun Plane (plane layer: these items are gaps in the copper):
  lines w10: 300,4400 300,4225 460,4065 460,3932.5 460,3852.5 460,3555 545,3470 830,3470 920,3560 920,3786.25 885,3821.25 885,3901.25 885,4165 940,4220 940,4405
Power Plane (plane layer: these items are gaps in the copper):
  circle w10: c4970,855 r75
  circle w10: c4770,855 r74.33
  circle w10: c4470,3575 r77.78
  circle w10: c4270,3575 r77.78
  circle w10: c4265,4005 r77.78
  circle w10: c4465,4005 r77.78
  lines w10: 0,0 0,850 4445,850 4445,1265 4785,1265 4785,1020 5510,1020 ; 970,4400 970,3695 3475,3695 3475,3605 3615,3605 4015,3605 5505,3605 ; 1410,4400 1410,4015 3665,4015 ; 3660,4015 5500,4015 ; 4620,1265 4620,1855 5360,1855 5360,1835 5500,1835 ; 4835,1110 4835,1205 4880,1205 4880,1110 4835,1110

## Silkscreen, mask and mechanical layers (free items; w line width, h text height)
Top Overlay:
  lines w6: 975,4048.64 975,3943.64 1400,3943.64 ; 1400,4043.64 1400,3943.64 ; 1800,4048.64 1800,3943.64 ; 2200,4048.64 2200,3943.64 ; 2625,4048.64 2625,3943.64 2200,3943.64 ; 1400,3943.64 1800,3943.64 ; 1800,3943.64 2200,3943.64
  lines w10: 40,40 195,40 220,40 220,220 40,220 40,40 ; 40,4180 40,4360 220,4360 220,4180 195,4180 40,4180 ; 5275,45 5275,225 5455,225 5455,45 5275,45 ; 5280,4180 5460,4180 5460,4360 5280,4360 5280,4180
  text "MOSFETS" at 4145,4120 h120
  text "FAN-0" at 2660,4018.64 h120
  text "FAN-1" at 2995,4018.64 h120
  text "HEAT-1" at 1855,3968.64 h100
  text "HEAT-2" at 2270,3968.64 h100
  text "HEATBED" at 1010,3963.64 h100
  text "HEAT-0" at 1455,3963.64 h100
  text "PWR IN 3" at 5035,3700 h100 r90
  text "12V - 24V" at 5105,3695 h100 r90
  text "HEATBED" at 4150,3680 h120
  text "PWR" at 50,3505 h100
  text "Thermocouples" at 3450,3370 h90
  text "Thermistors" at 4260,3370 h90
  text "TX" at 45,3320 h100
  text "PWR IN 2" at 5025,3300 h100 r90
  text "12V - 24V" at 5105,3300 h100 r90
  text "RX" at 45,3135 h100
  text "Smart Port" at 4710,2975 h160
  text "X AXIS" at 45,2950 h100
  text "Y AXIS" at 45,2770 h100
  text "Z AXIS" at 45,2580 h100
  text "EXT-0" at 45,2395 h100
  text "Tigershark 3D" at 1995,2350 h220
  text "X" at 3454,2334 h300
  text "Y" at 3869,2334 h300
  text "Z" at 4319,2334 h300
  text "Prototype ZERO 0.1a" at 2290,2285 h80
  text "EXT-1" at 45,2215 h100
  text "MOT/ PIO EXP" at 405,2080 h160 r270
  text "3.3V 2A" at 5450,2080 h150 r90
  text "S" at 2215,1980 h175
  text "S" at 2830,1975 h2000
  text "Z" at 2550,1940 h73
  text "MAX / MIN" at 4660,1690 h120 r90
  text "AVR" at 855,1515 h150
  text "ENDSTOPS" at 3210,1420 h120
  text "5V 3A" at 5450,1265 h150 r90
  text "PWR IN 2" at 5035,329.5 h90 r90
  text "12V - 24V" at 5100,329.5 h90 r90
  text "STEPPER DRIVERS" at 125,250 h130 r90
  text "2.5A Per Phase" at 215,250 h130 r90
  text "X" at 270,45 h300
  text "Y" at 1145,45 h300
  text "Z" at 2020,45 h300
  text "E" at 2890,45 h300
  text "0" at 3585,45 h300
  text "E" at 3780,45 h300
  text "1" at 4460,45 h300
Bottom Overlay:
  text "G" at 6515,2155 h325
  text "Tigershark 3D" at 4500,1455 h250
  text "Based On the Work of Ultimachine," at 4495,1320 h140
  text "Arduino, RepRap, and Synthetos.com" at 4495,1205 h140
  text "Developed by Adam Vadala-Roth in" at 4495,1090 h140
  text "collaboration with Johnny Russel" at 4495,970 h140
  text "and Alden Hart" at 4495,855 h140
  text "S" at 3830,580 h2000
  text "S" at 4510,535 h175
  text "Z" at 4165,515 h75
Mechanical 15:
  lines w10: 0,0 5500,0 5500,400 5500,760 5500,4400 0,4400 0,0

## Text inside footprints (layer, text, board x,y; h text height)
FAN-1: Mechanical 16 "1" at 3262.5,4285.08 h62 r180
FAN-2: Mechanical 16 "1" at 2927.5,4285.08 h62 r180
FETS: Top Overlay "8" at 2400,4112.58 h77.5; Top Overlay "7" at 2200,4112.58 h77.5; Top Overlay "6" at 2000,4112.58 h77.5; Top Overlay "5" at 1800,4112.58 h77.5; Top Overlay "1" at 1015,4112.58 h77.5; Top Overlay "2" at 1200,4112.58 h77.5; Top Overlay "3" at 1400,4112.58 h77.5; Top Overlay "4" at 1600,4112.58 h77.5
"Heat Power": Top Overlay "1" at 5185,4070 h77.5 r270; Top Overlay "2" at 5185,3885 h77.5 r270; Top Overlay "3" at 5185,3685 h77.5 r270; Top Overlay "4" at 5185,3485 h77.5 r270
MAX1_EndstopChannel1: Mechanical 16 "1" at 3367.5,1762.5 h62
MAX1_EndstopChannel2: Mechanical 16 "1" at 4207.5,1762.5 h62
MAX1_EndstopChannel3: Mechanical 16 "1" at 3787.5,1762.5 h62
MIN1_EndstopChannel1: Mechanical 16 "1" at 3692.5,2127.5 h62 r180
MIN1_EndstopChannel2: Mechanical 16 "1" at 4532.5,2127.5 h62 r180
MIN1_EndstopChannel3: Mechanical 16 "1" at 4112.5,2127.5 h62 r180
"Motor Power": Top Overlay "1" at 5185,685 h77.5 r270; Top Overlay "2" at 5185,500 h77.5 r270
P2_ThermistorChannel1: Mechanical 16 "1" at 4507.5,2702.5 h62 r90
P2_ThermistorChannel2: Mechanical 16 "1" at 4507.5,3087.5 h62 r90
T2_ThermocoupleChannel1: Mechanical 16 "1" at 3952.5,2702.5 h62 r90
T2_ThermocoupleChannel2: Mechanical 16 "1" at 3952.5,3087.5 h62 r90
U3: Top Overlay "TQFP 144" at 1383.05,2352.36 h49.6 r270; Top Overlay "R" at 1438.56,2107.73 h37.2 r270